# Altium PCB board.PcbDoc
Units mil, origin at the board's own origin, x right, y up, seen from the top; angles counter-clockwise.
Board outline 1533 x 1467.5 mil, 2 copper layers (Top Layer, Bottom Layer); 26 components, 23 nets, 137 pads, 14 vias.
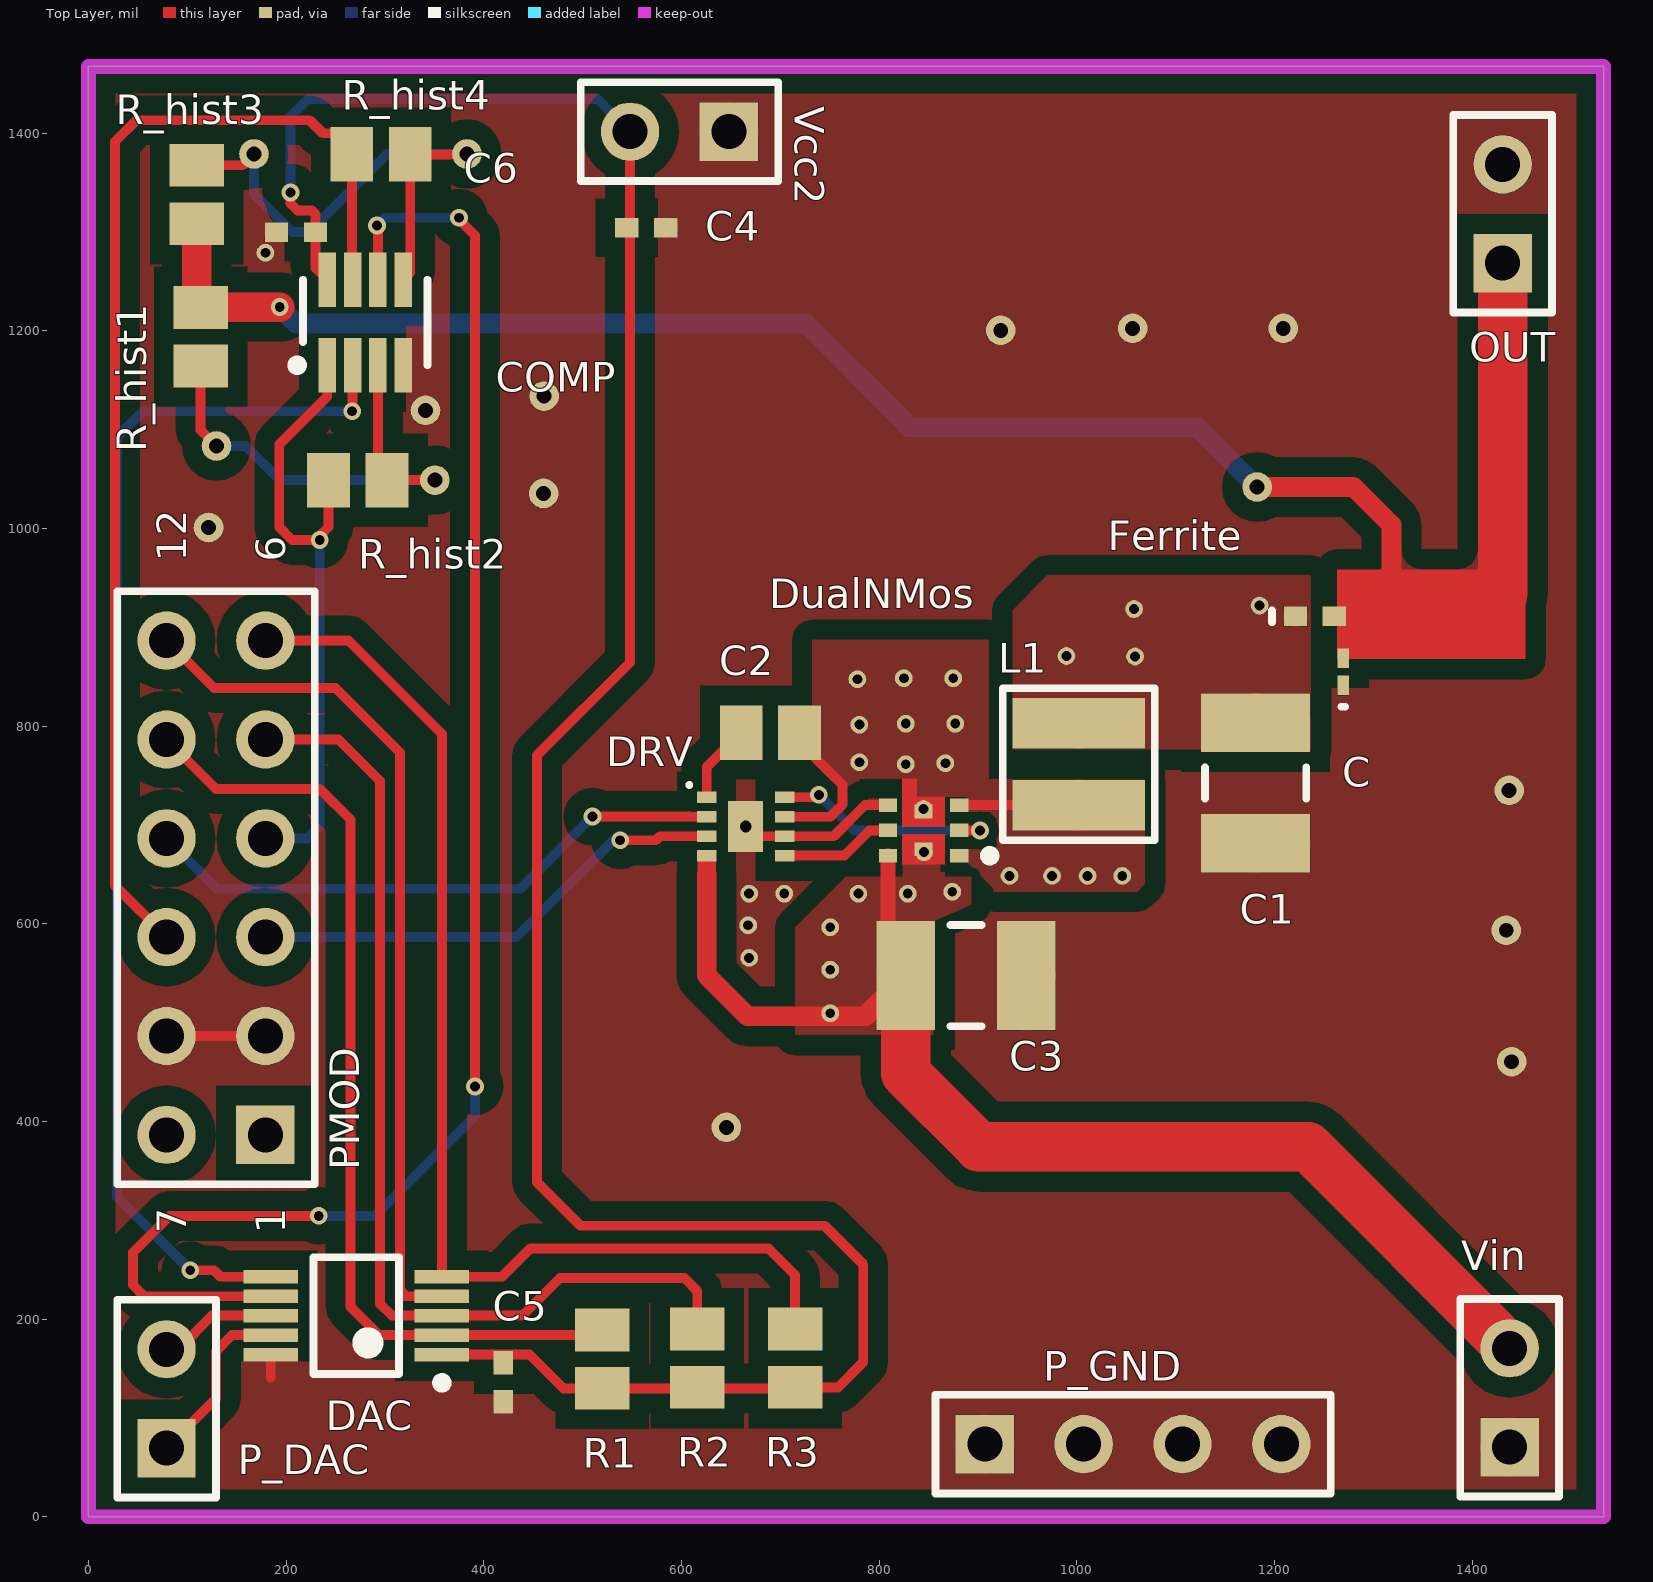
[diagram p0: Top Layer view]
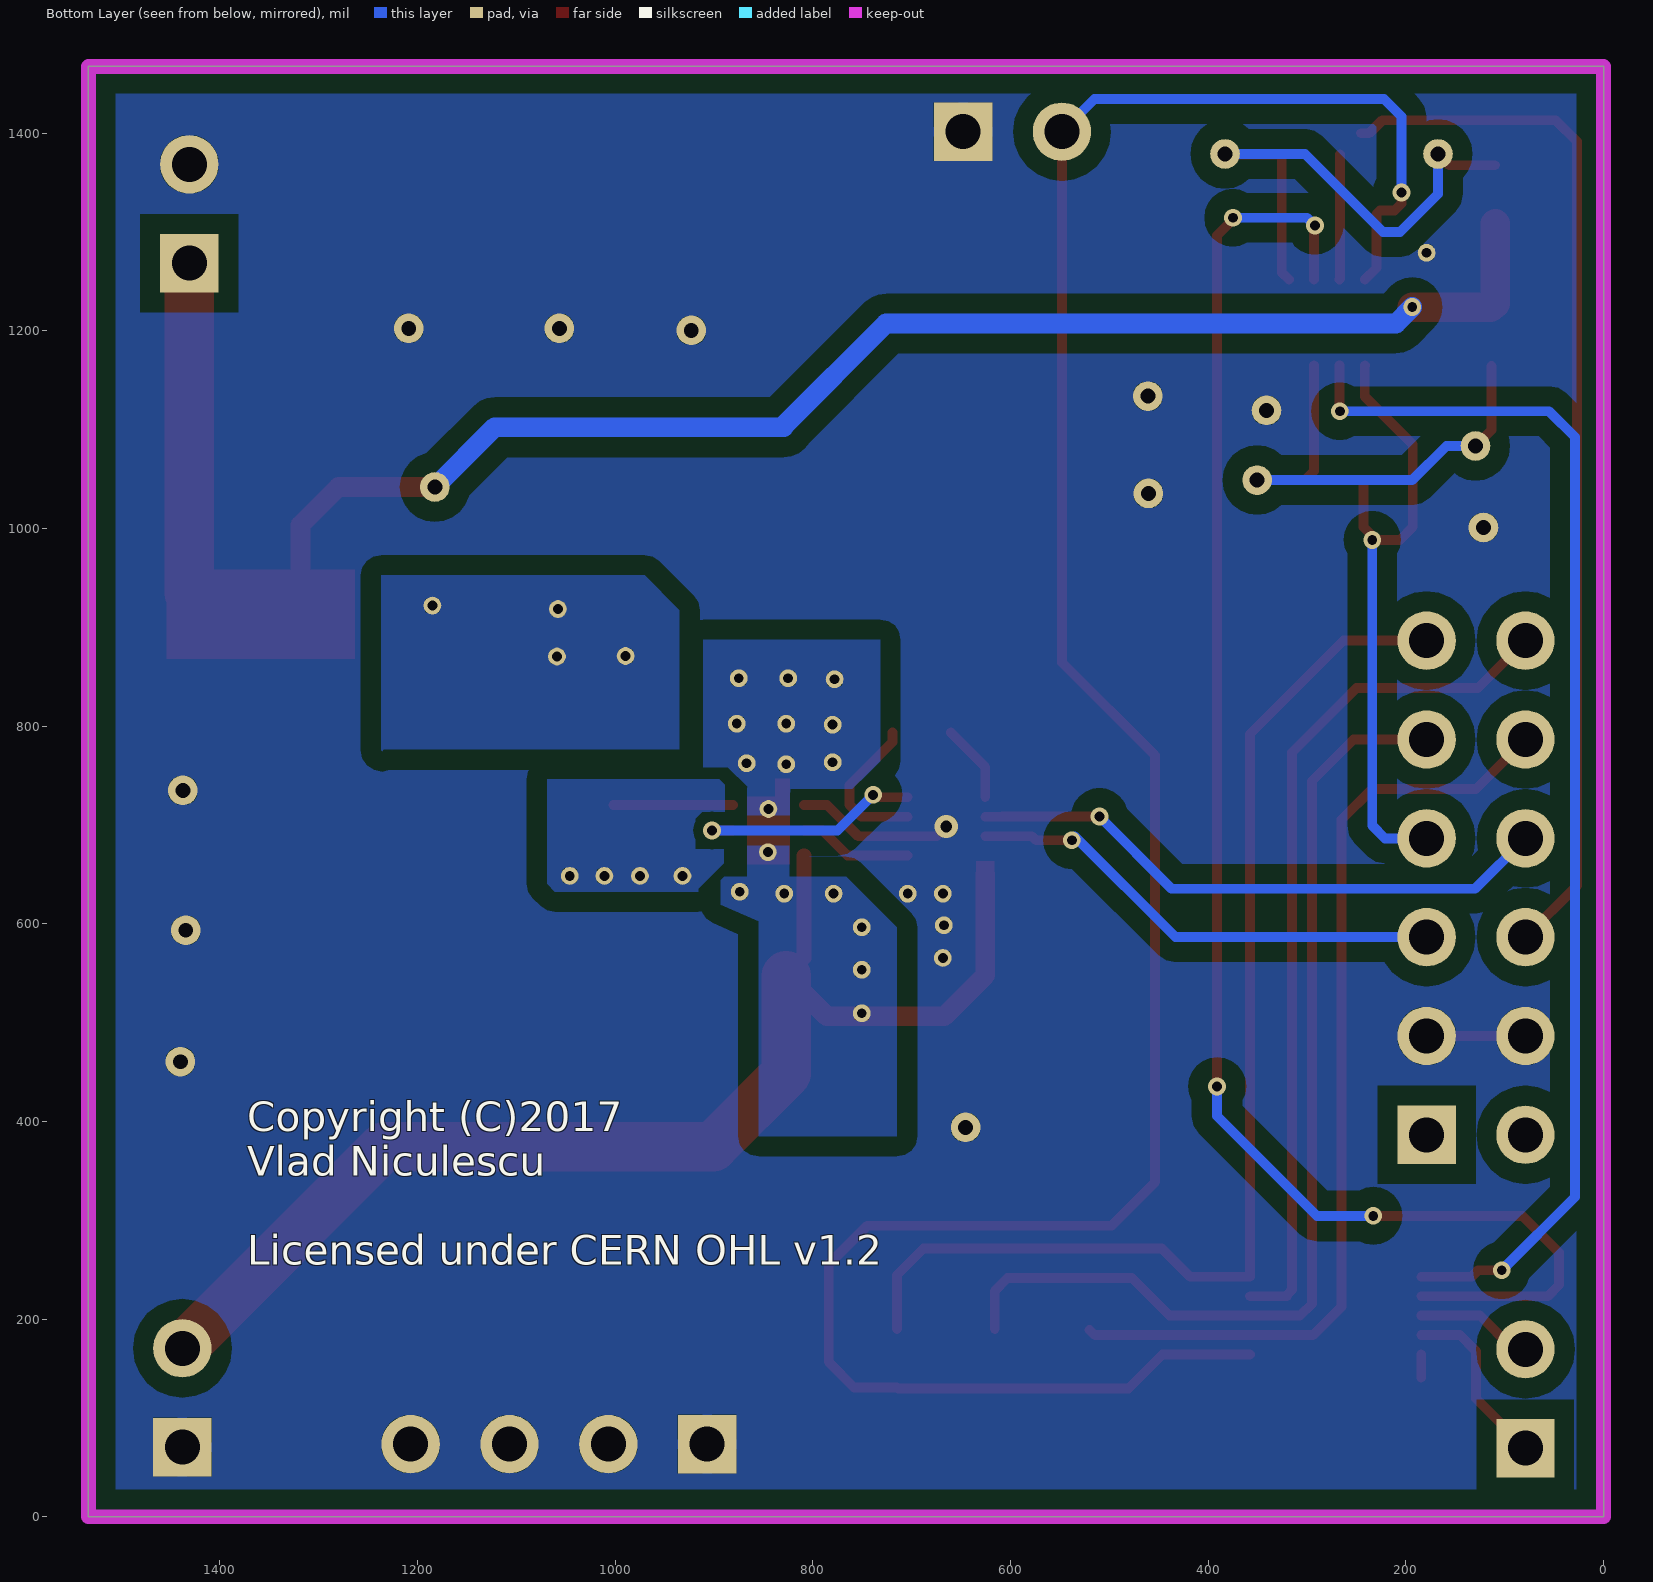
[diagram p1: Bottom Layer view, seen from below]

## Layer stack, top to bottom
Top Solder: solder mask 0.4, Solder Resist, Dk 3.5
Top Layer: signal copper 1.4
Dielectric 1: dielectric 12.6, FR-4, Dk 4.8
Bottom Layer: signal copper 1.4
Bottom Solder: solder mask 0.4, Solder Resist, Dk 3.5

## Board outline
0,0 1533,0 1533,1467.5 0,1467.5

## Design rules (kind name [scope] priority, off if disabled: settings)
Clearance Clearance_1 [InNet('GND')] p1: gap=20 except(30: SMDPad-SMDPad)
Clearance [All] p2: gap=10
PolygonConnect PolygonConnect_5 [InNet('VOUTBUCK')] p1: connectstyle=Relief reliefconductorwidth=10 reliefentries=4 polygonreliefangle="90 Angle" airgapwidth=0
PolygonConnect PolygonConnect_4 [InNet('GND')] p2: connectstyle=Relief reliefconductorwidth=10 reliefentries=4 polygonreliefangle="90 Angle" airgapwidth=0
PolygonConnect PolygonConnect_3 [InNet('JONC')] p3: connectstyle=Relief reliefconductorwidth=10 reliefentries=4 polygonreliefangle="90 Angle" airgapwidth=0
PolygonConnect PolygonConnect_2 [InNet('VOUT')] p4: connectstyle=Relief reliefconductorwidth=10 reliefentries=4 polygonreliefangle="90 Angle" airgapwidth=0
PolygonConnect PolygonConnect_1 [InNet('VCC')] p5: connectstyle=Relief reliefconductorwidth=10 reliefentries=4 polygonreliefangle="90 Angle" airgapwidth=0
PolygonConnect [All] p6: connectstyle=Relief reliefconductorwidth=10 reliefentries=4 polygonreliefangle="90 Angle" airgapwidth=15
RoomDefinition Sheet1 [InComponentClass('Sheet1')] p1: confinementstyle=ConfineIn formatcopy=TRUE lockcomponents=FALSE outline -1119,-3332.5 881,-3332.5 881,-2332.5 -1119,-2332.5
RoutingVias [All] p1: holewidth=10 width=18 viastyle="Through Hole" minholewidth=10 minwidth=18 maxholewidth=10 maxwidth=18
SolderMaskExpansion [All] p1: expansion=4
Width Width_2 [InNet('VCC')] p1: maxlimit=20 minlimit=10 preferedwidth=20
Width Width_1 [InNet('VOUT')] p2: maxlimit=50 minlimit=10 preferedwidth=50
Width [All] p3: maxlimit=10 minlimit=10 preferedwidth=10
30 further rules are at their usual default settings.

## Components (designator, comment, footprint, x,y, rotation, side; value= is the part's Value field where it differs from the comment)
C "Cap" 0603 1269.5,855 r90 top
C1 "Cap" C1210_M 1181,742.5 r90 top
C2 "Cap" C0805 690,793.5 r180 top
C3 "Cap" C1210_M 888,547.5 r0 top
C4 "Cap" 0402 564.5,1304.5 r0 top
C5 "Cap" 0402 419.5,136 r270 top
C6 "Cap" 0402 210,1300 r180 top
COMP "MAX9107" SOT23-8 280,1208.5 r0 top
DAC "MCP4728" TSSOP50P500X110-10N 271,203.5 r180 top
DRV "NCP81151B" QFN50P200X200X80_HS-9N 665,698.5 r0 top
DualNMos "NTLUD4C26N" ONSC-UDFN-6-517BF_V 845,694.5 r180 top
Ferrite "74438336022" 0402-A 1241,911 r0 top
L1 "74438336022" WE-MAPI_3020 1002,761.5 r90 top
OUT "Header 2" HDR1X2 1431,1268.5 r90 top
P_DAC "Header 2" HDR1X2 79,69.5 r90 top
P_GND "Header 4" HDR1X4 907,73.5 r0 top
PMOD "Header 6X2A" HDR2X6_CEN 179,386.5 r90 top
R1 "Res1" C0805 520,159.5 r270 top
R2 "Res1" C0805 616,160.5 r270 top
R3 "Res1" C0805 715,160.5 r270 top
R_hist1 "Res1" C0805 113.5,1194 r90 top
R_hist2 "Res1" C0805 272.5,1049 r0 top
R_hist3 "Res1" C0805 109.5,1338 r90 top
R_hist4 "Res1" C0805 296,1378.5 r180 top
Vcc2 "Header 2" HDR1X2 648,1401.5 r180 top
Vin "Header 2" HDR1X2 1438,70.5 r90 top

## Footprints (in the part's own frame and the unit in brackets; to place one, negate y for a bottom-side part, rotate by r counter-clockwise, add the part's x,y. Pads: shape width x height; smd on the part's side, far side on the other; paste and mask are expansions set on the pad)
0402 [mm] "Chip Capacitor, Body 1.0x0.5mm, IPC High Density"
  rect 0.6x0.5 smd: 1(-0.5,0) 2(0.5,0)
  body extent -0.55,-0.3 0.55,0.3, height 1.3
0402-A [mm] "Chip Inductor, Body 1.0x0.5mm, IPC High Density"
  rect 0.6x0.5 smd: 1(-0.5,0) 2(0.5,0)
  silkscreen extent -1.1,-0.15 -1.1,0.15, body extent -0.55,-0.3 0.55,0.3, height 0.55
0603 [mm] "Chip Inductor, Body 0.6x0.3mm, IPC High Density"
  rect 0.5x0.3 smd: 1(-0.35,0) 2(0.35,0)
  silkscreen extent -0.9,-0.05 -0.9,0.05, body extent -0.33,-0.18 0.33,0.18, height 0.55
C0805 [mm] "Chip Capacitor, Body 2.0x1.3mm, IPC High Density"
  rect 1.1x1.4 smd: 1(-0.75,0) 2(0.75,0)
  body extent -1.1,-0.72 1.1,0.72, height 1.4
C1210_M [mm] "Chip Capacitor, Body 3.2x2.5mm, IPC Low Density"
  rect 1.5x2.8 smd: 1(-1.55,0) 2(1.55,0)
  silkscreen extent -0.4,-1.3 0.4,1.3, body extent -1.7,-1.35 1.7,1.35, height 1.5
HDR1X2 [mm] "Connector; Header; 2 Position"
  rect 1.5x1.5 hole 0.9: 1(0,0)
  round 1.5 hole 0.9: 2(2.54,0)
  silkscreen extent -1.27,-1.27 3.81,1.27
HDR1X4 [mm] "Connector; Header; 4 Position"
  rect 1.5x1.5 hole 0.9: 1(0,0)
  round 1.5 hole 0.9: 2(2.54,0) 3(5.08,0) 4(7.62,0)
  silkscreen extent -1.27,-1.27 8.89,1.27
HDR2X6_CEN [mm] "Connector; Header; 6x2 Position"
  rect 1.5x1.5 hole 0.9: 1(0,0)
  round 1.5 hole 0.9: 2(2.54,0) 3(5.08,0) 4(7.62,0) 5(10.16,0) 6(12.7,0) 7(0,2.54) 8(2.54,2.54) 9(5.08,2.54) 10(7.62,2.54) 11(10.16,2.54) 12(12.7,2.54)
  silkscreen extent -1.27,-1.27 13.97,3.81
ONSC-UDFN-6-517BF_V [mm] "SON, 6-Leads, Body 2x2mm, Pitch 0.65mm"
  rect 0.47x0.35 smd: 1(-0.915,0.65) 2(-0.915,0) 3(-0.915,-0.65) 4(0.915,-0.65) 5(0.915,0) 6(0.915,0.65)
  rect 0.47x0.35 smd paste+0 mask+0: 7(0,0.485) 8(0,-0.485)
  Top Layer region: -0.55,-0.87 -0.55,-0.1 0.55,-0.1 0.55,-0.87
  Top Layer region: -0.55,0.1 -0.55,0.87 0.55,0.87 0.55,0.1
  silkscreen extent -1.83,0.53 -1.58,0.77, body extent -1,-1 1,1, height 0.55
QFN50P200X200X80_HS-9N [mm] "QFN, 8-Leads, Body 2.00x2.00mm, Pitch 0.50mm, Thermal Pad 1.80x1.80mm, IPC Medium Density"
  rect 0.5x0.3 smd: 1(-1,0.75) 2(-1,0.25) 3(-1,-0.25) 4(-1,-0.75) 5(1,-0.75) 6(1,-0.25) 7(1,0.25) 8(1,0.75)
  rect 0.9x1.3 smd: 9(0,0)
  silkscreen extent -1.5,1.02 -1.4,1.12, body extent -1,-1 1,1, height 0.8
SOT23-8 [mm] "SSOP; 8 Leads; Body Width 1.6 mm; Pitch 0.65 mm"
  rect 0.45x1.4 smd: 1(-0.975,-1.1) 2(-0.325,-1.1) 3(0.325,-1.1) 4(0.975,-1.1) 5(0.975,1.1) 6(0.325,1.1) 7(-0.325,1.1) 8(-0.975,1.1)
  silkscreen extent -1.87,-1.22 1.6,1.1
TSSOP50P500X110-10N [mm] "TSSOP, 10-Leads, Body 3.00x3.00mm, Pitch 0.50mm, IPC Medium Density"
  rect 1.4x0.35 smd: 1(-2.2,1) 2(-2.2,0.5) 3(-2.2,0) 4(-2.2,-0.5) 5(-2.2,-1) 6(2.2,-1) 7(2.2,-0.5) 8(2.2,0) 9(2.2,0.5) 10(2.2,1)
  silkscreen extent -2.33,-1.5 1.1,1.85, body extent -1.5,-1.5 1.5,1.5, height 1.1
WE-MAPI_3020 [mm] "SMD Shielded Power Inductor, 2-Leads, body 3.0x3.0"
  rect 1.3x3.4 smd: 1(-1.05,0) 2(1.05,0)
  silkscreen extent -1.95,-1.95 1.95,1.95, body extent -1.5,-1.5 1.5,1.5, height 2.01

## Part data
C C1 C2 C3 C4 C5 C6: "Capacitor"
Ferrite L1: "WE-MAPI SMD Shielded Power Inductor, size 3020, 2.2 uH"
OUT P_DAC Vcc2 Vin: "Header, 2-Pin"
P_GND: "Header, 4-Pin"
PMOD: "Header, 6-Pin, Dual row"
R1 R2 R3 R_hist1 R_hist2 R_hist3 R_hist4: "Resistor"

## Free pads (board coordinates)
  round 18 hole 10: 5(667.52,598.5) 5(668.52,565.5) 5(668.52,630.5) 5(704.03,630.5) 5(750.52,509.5) 5(750.52,553.5) 5(750.52,596.5) 5(778,847.5) 5(779,630.5) 5(780,763.5) 5(780,801.5) 5(825,848.5) 5(827,761.5) 5(827,802.5) 5(829,630.5) 5(845,716.18) 5(845.5,672.5) 5(867,762.5) 5(874,632.5) 5(875,848.5) 5(877,802.5) 5(932,648.5) 5(975,648.5) 5(989.5,871) 5(1011,648.5) 5(1046,648.5) 5(1058,918.5) 5(1059,870.5) 5(1185,922) 7(179,1279)
  round 30 hole 15: 6(121.5,1001) 8(341,1119.5) 8(460.5,1035.5) 8(461,1134) 8(645.5,394) 8(923,1200.5) 8(1056.5,1202.5) 8(1209,1202.5) 8(1434.5,593.5) 8(1437.5,735) 8(1440,460.5) 9(350.5,1049) 10(129.5,1083.5) 12(167.5,1379) 12(383,1379) 13(1182.5,1042)

## Via types
v1: diameter 18, hole 10, Top Layer to Bottom Layer, 13 vias
v2: diameter 23.62, hole 11.81, Top Layer to Bottom Layer, 1 vias

## Nets (pads, with @x,y where several pads share a name; then routed paths per layer and width w, separated by ;. In a path a pad name is that pad's centre, name@x,y a point inside that pad or via, vN(x,y) a via of type N, cw(c..) or ccw(c..) an arc to the next point about the centre after c; other vN are vias at no path point)
CTRL1: DRV.8 DualNMos.2 | length 234.5
  Top Layer w10: DRV.8 736.53,728.03 v1(739,730.5) ; DualNMos.2 v1(902,694.5)
  Bottom Layer w10: v1(739,730.5) 775,694.5 v1(902,694.5)
CTRL2: DRV.5 DualNMos.5 | length 115.2
  Top Layer w10: DRV.5 764.92,668.97 790.45,694.5 DualNMos.5
EN: DRV.3 PMOD.3 | length 492.8
  Top Layer w10: v1(538,684.5) 574,684.5 578.16,688.66 DRV.3
  Bottom Layer w10: PMOD.3 433,586.5 535,688.5 538,685.5 v1(538,684.5)
FB: COMP.1 PMOD.4 R_hist2.1 | length 645.7
  Top Layer w10: COMP.1 241.39,1164.97 241.61,1164.75 241.61,1133.61 193,1085 193,1001.5 206,988.5 v1(234,988.5) 232,990.5 242.97,1001.47 R_hist2.1
  Bottom Layer w10: PMOD.4 221,686.5 234,699.5 v1(234,988.5)
FB2: COMP.7 PMOD.9 R_hist4.2 | length 1186.5
  Top Layer w10: PMOD.9 27,638.5 27,1391.5 48.56,1413.06 223.94,1413.06 237,1400 R_hist4.2@245.65,1400 ; R_hist4.2 266.47,1252.54 COMP.7
GND: C1.1 C3.2 C4.2 C5.2 C6.2 C.1 COMP.4 DAC.10 DRV.6 DRV.9 DualNMos.4 OUT.2 P_GND.1 P_GND.2 P_GND.3 P_GND.4 pad.5@667.52,598.5 pad.5@668.52,565.5 pad.5@668.52,630.5 pad.5@704.03,630.5 pad.6 pad.7 pad.8 PMOD.2 PMOD.8 Vcc2.1 Vin.1 | length 284.3
  Top Layer w10: PMOD.8 PMOD.2 ; 184.39,140.89 DAC.10 ; v2(665,698.5) 674.84,688.66 DRV.6 754.16,688.66 785.59,720.09 DualNMos.4
JONC: C2.1 DRV.7 DualNMos.1 DualNMos.3 DualNMos.8 L1.1 pad.5@778,847.5 pad.5@780,763.5 pad.5@780,801.5 pad.5@825,848.5 pad.5@827,761.5 pad.5@827,802.5 pad.5@845,716.18 pad.5@867,762.5 pad.5@875,848.5 pad.5@877,802.5 pad.5@932,648.5 pad.5@975,648.5 pad.5@1011,648.5 pad.5@1046,648.5 | length 275.7
  Top Layer w10: DRV.7 750.84,708.34 763,720.5 763,740.44 719.53,783.91 C2.1 ; DualNMos.3 1001.93,720.09 L1.1
LDAC: DAC.4 PMOD.12 | length 872.6
  Top Layer w10: PMOD.12 127,838.5 250,838.5 315.06,773.44 315.06,229.77 320.32,224.51 320.32,223.18 DAC.4
NetC2_2: C2.2 DRV.1 | length 79.9
  Top Layer w10: DRV.1 625.63,758.66 C2.2
NetCOMP_3: COMP.3 pad.9 pad.10 R_hist1.1 R_hist2.2 | length 492.1
  Top Layer w10: R_hist1.1 113.5,1099.5 pad.10 ; COMP.3 292.8,1058.23 R_hist2.2 pad.9 pad.9@350,1048.5
  Bottom Layer w10: pad.10 159,1083.5 193.5,1049 pad.9
NetCOMP_5: COMP.5 pad.12 R_hist3.2 R_hist4.1 | length 551.7
  Top Layer w10: R_hist3.2 156.03,1367.53 pad.12@167.5,1379 ; COMP.5 325.53,1258.95 R_hist4.1 371,1378.5 pad.12@377.5,1372
  Bottom Layer w10: pad.12@167.5,1379 167.5,1338.58 206.08,1300 223,1300 302,1379 pad.12@383,1379
NetDAC_8: DAC.8 P_DAC.2 | length 104.6
  Top Layer w10: P_DAC.2@93,171.5 125,203.5 DAC.8
NetDAC_9: DAC.9 P_DAC.1 | length 180.9
  Top Layer w10: P_DAC.1 129,119.5 129,167.5 145.31,183.81 DAC.9
PWM: DRV.2 PMOD.10 | length 597.8
  Top Layer w10: v1(510,708.5) 608.2,708.5 ; 608.35,708.34 DRV.2
  Bottom Layer w10: PMOD.10 130,635.5 437,635.5 v1(510,708.5)
RDY: DAC.5 PMOD.6 R3.1 | length 1199.5
  Top Layer w10: PMOD.6 263,886.5 357.61,791.89 DAC.5@357.61,245.07 ; DAC.5 418.37,242.87 447,271.5 688,271.5 715,244.5 R3.1
SCL: DAC.2 PMOD.11 R1.1 | length 981.6
  Top Layer w10: PMOD.11 129,736.5 234,736.5 265,705.5 265,212.5 293.69,183.81 DAC.2 514.79,183.81 R1.1
SDA: DAC.3 PMOD.5 R2.1 | length 1048
  Top Layer w10: PMOD.5 253,786.5 295.06,744.44 295.06,215.44 307,203.5 DAC.3 439,203.5 477,241.5 603,241.5 616,228.5 R2.1
VCC: C3.1 DRV.4 DualNMos.6 DualNMos.7 pad.5@750.52,509.5 pad.5@750.52,553.5 pad.5@750.52,596.5 pad.5@779,630.5 pad.5@829,630.5 pad.5@845.5,672.5 pad.5@874,632.5 Vin.2 | length 1291.8
  Top Layer w15: DualNMos.6 808.98,565.5 C3.1
  Top Layer w20: 625.63,650.13 625.63,547.87 667,506.5 785.98,506.5 C3.1
  Top Layer w50: C3.1 826.98,448.52 901,374.5 1234,374.5 Vin.2
VCC2: C4.1 C5.1 C6.1 COMP.8 DAC.1 R1.2 R2.2 R3.2 Vcc2.2 | length 2570.2
  Top Layer w10: v1(204.5,1340) 204.5,1328.82 211.63,1321.7 226,1321.7 229.68,1318.01 C6.1 229.68,1263.74 COMP.8 ; DAC.1 446.37,164.13 480.53,129.97 R1.2 714,129.97 R3.2 758.47,130.97 784,156.5 784,255.5 745,294.5 498,294.5 454,338.5 454,770.5 548,864.5 Vcc2.2
  Bottom Layer w10: v1(204.5,1340) 204.5,1417 222,1434.5 515,1434.5 Vcc2.2
VOUT: C.2 Ferrite.2 OUT.1 pad.13 R_hist1.2 R_hist3.1 | length 1792
  Top Layer w20: pad.13 1280,1042 1318.5,1003.5 1318.5,921.67
  Top Layer w30: R_hist1.2@109.5,1227.53 R_hist3.1 ; R_hist1.2@114,1224.03 v1(193.47,1224.03)
  Top Layer w50: 1431,934.5 OUT.1
  Bottom Layer w20: v1(193.47,1224.03) 210,1207.5 726,1207.5 829.5,1104 ; 829.5,1102.5 1122,1102.5 pad.13
VOUTBUCK: C1.2 Ferrite.1 L1.2 pad.5@989.5,871 pad.5@1058,918.5 pad.5@1059,870.5 pad.5@1185,922
VREF: COMP.2 DAC.6 | length 1253.3
  Top Layer w10: v1(103,249.5) 127,249.5 133.63,242.87 DAC.6 ; v1(266.8,1118.7) 267.2,1118.7 COMP.2
  Bottom Layer w10: v1(103,249.5) 29,323.5 29,1092.5 55.2,1118.7 v1(266.8,1118.7)
VREF2: COMP.6 DAC.7 | length 1637.2
  Top Layer w10: DAC.7 56.32,223.18 45,234.5 45,267.5 82,304.5 v1(233,304.5) ; v1(292,1306.5) 292.8,1305.7 COMP.6 ; v1(375,1314.5) 375,1312.5 391,1296.5 v1(391,435.5)
  Bottom Layer w10: v1(233,304.5) 290,304.5 391,405.5 v1(391,435.5) ; v1(292,1306.5) 300,1314.5 v1(375,1314.5)
pads on no net: PMOD.1 PMOD.7

## Polygon pours and split planes (outlines as drawn)
GND on Top Layer "Top Layer-No Net" (solid, pour order 56): -2.31,1465.96 1527.69,1465.96 1522.69,1460.96 1522.69,4.96 -3.31,4.96 -5.31,6.96
JONC on Top Layer "Top Layer-No Net" (solid, pour order 54): 890,661.5 916,635.5 916,632.5 1061,632.5 1069,640.5 1069,746.5 895,746.5 890,741.5 889,740.5 889,713.5 912,713.5 916,709.5 919,706.5 919,677.5 919,675.5 890,675.5
VOUTBUCK on Top Layer "Top Layer-No Net" (solid, pour order 46): 935,776.5 1234,776.5 1236,774.5 1237,775.5 1237,952.5 970,952.5 936,918.5 935,917.5 935,777.5
JONC on Top Layer "Top Layer-No Net" (solid, pour order 40): 823.35,698.44 823.35,728.75 823,736.5 760,736.5 732.43,764.07 732.43,887.5 911,887.5 911,742.78 900,728.75 891.17,728.75 866.65,728.75 866.65,698.44
VCC on Top Layer "Top Layer-No Net" (solid, pour order 38): 866.65,690.56 866.65,660.25 866.65,647.85 893,647.5 893,619.5 855,602.5 855,487.5 715,487.5 715,596.5 766,647.5 824,647.5 824,659.59 823.35,660.25 866.65,660.25
VOUT on Top Layer "Top Layer-No Net" (solid, pour order 60): 1324,870.89 1327.39,867.5 1455,867.5 1455,869.5 1453.5,871 1456.5,874 1456.5,983 1326,983 1315,972 1318.5,968.5 1318.5,869
GND on Bottom Layer "Top Layer-No Net" (solid, pour order 58): 0,1462.5 1530,1462.5 1525,1457.5 1525,1.5 -1,1.5 -3,3.5
JONC on Bottom Layer "Top Layer-No Net" (solid, pour order 34): 890,661.5 916,635.5 916,632.5 1061,632.5 1069,640.5 1069,746.5 895,746.5 890,741.5 889,740.5 889,713.5 912,713.5 916,709.5 919,706.5 919,677.5 919,675.5 890,675.5
VOUTBUCK on Bottom Layer "Top Layer-No Net" (solid, pour order 48): 935,776.5 1234,776.5 1236,774.5 1237,775.5 1237,952.5 970,952.5 936,918.5 935,917.5 935,777.5
JONC on Bottom Layer "Top Layer-No Net" (solid, pour order 44): 823.35,702.5 823.35,728.75 823,736.5 760,736.5 731.77,764.73 731.77,887.5 911,887.5 911,758.5 886,758.5 866,738.5 866.65,737.85 866.65,702.5
VCC on Bottom Layer "Top Layer-No Net" (solid, pour order 42): 866.65,686.51 866.65,660.25 866.65,647.85 893,647.5 893,619.5 855,602.5 855,385 715,385 715,596.5 766,647.5 824,647.5 824,659.59 824,686.45

## Keep-outs
Keep-Out Layer:
  the board outline again, w15

## Other copper
Top Layer:
  rectangle net VCC: 616,651.5 635,663.5
  rectangle net JONC: 823.35,728.75 838.23,746.98
  rectangle net VOUT: 1263.5,868 1454,958.5

## Silkscreen, mask and mechanical layers (free items; w line width, h text height)
Bottom Overlay:
  text "Copyright (C)2017 / Vlad Niculescu /  / Licensed under CERN OHL v1.2" at 1372.5,255 h30

## Text inside footprints (layer, text, board x,y; h text height)
PMOD: Top Overlay "7" at 99,286.5 h30 r90; Top Overlay "1" at 199,286.5 h30 r90; Top Overlay "6" at 199,966.5 h30 r90; Top Overlay "12" at 99,966.5 h30 r90